# Altium PCB PCB2.PcbDoc
Units mm, origin at the board's own origin, x right, y up, seen from the top; angles counter-clockwise.
Board outline 85.12 x 55.68 mm, 2 copper layers (Top Layer, Bottom Layer), stack 1.569 mm thick; 61 components, 50 nets, 268 pads, 0 vias.
Unrouted connection lines stored in the file: 2.
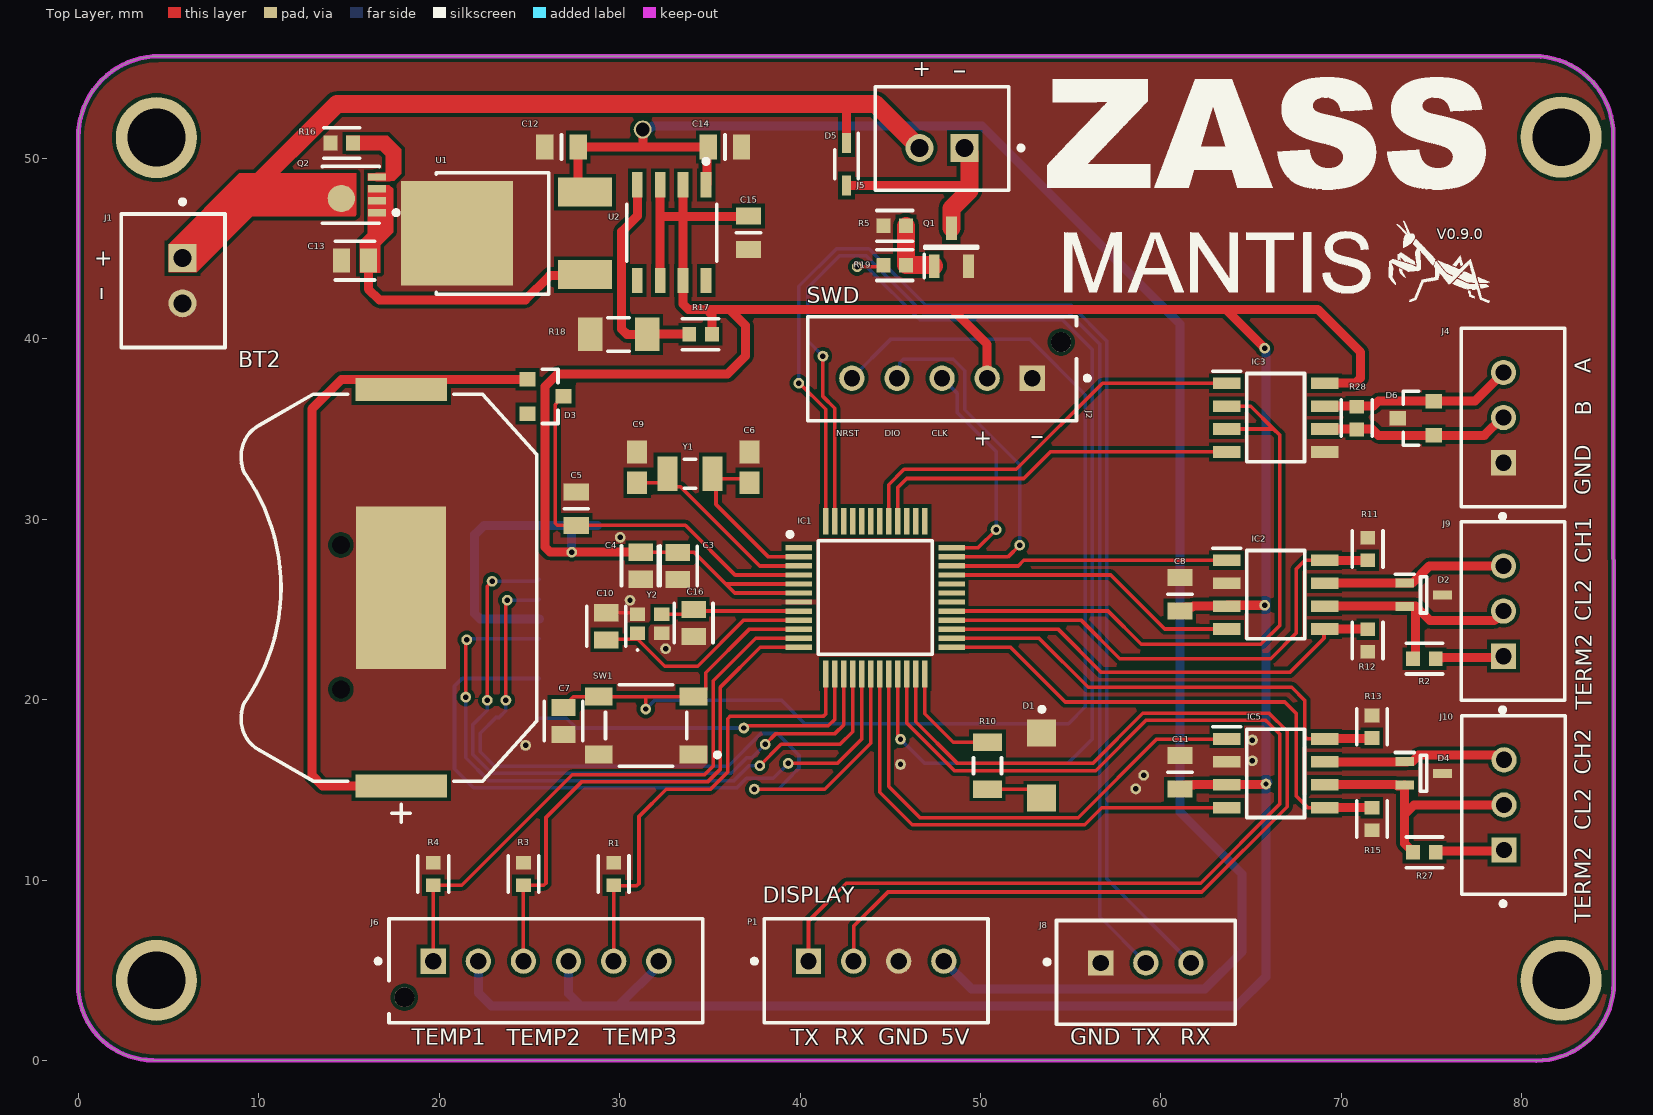
[diagram p0: Top Layer view]
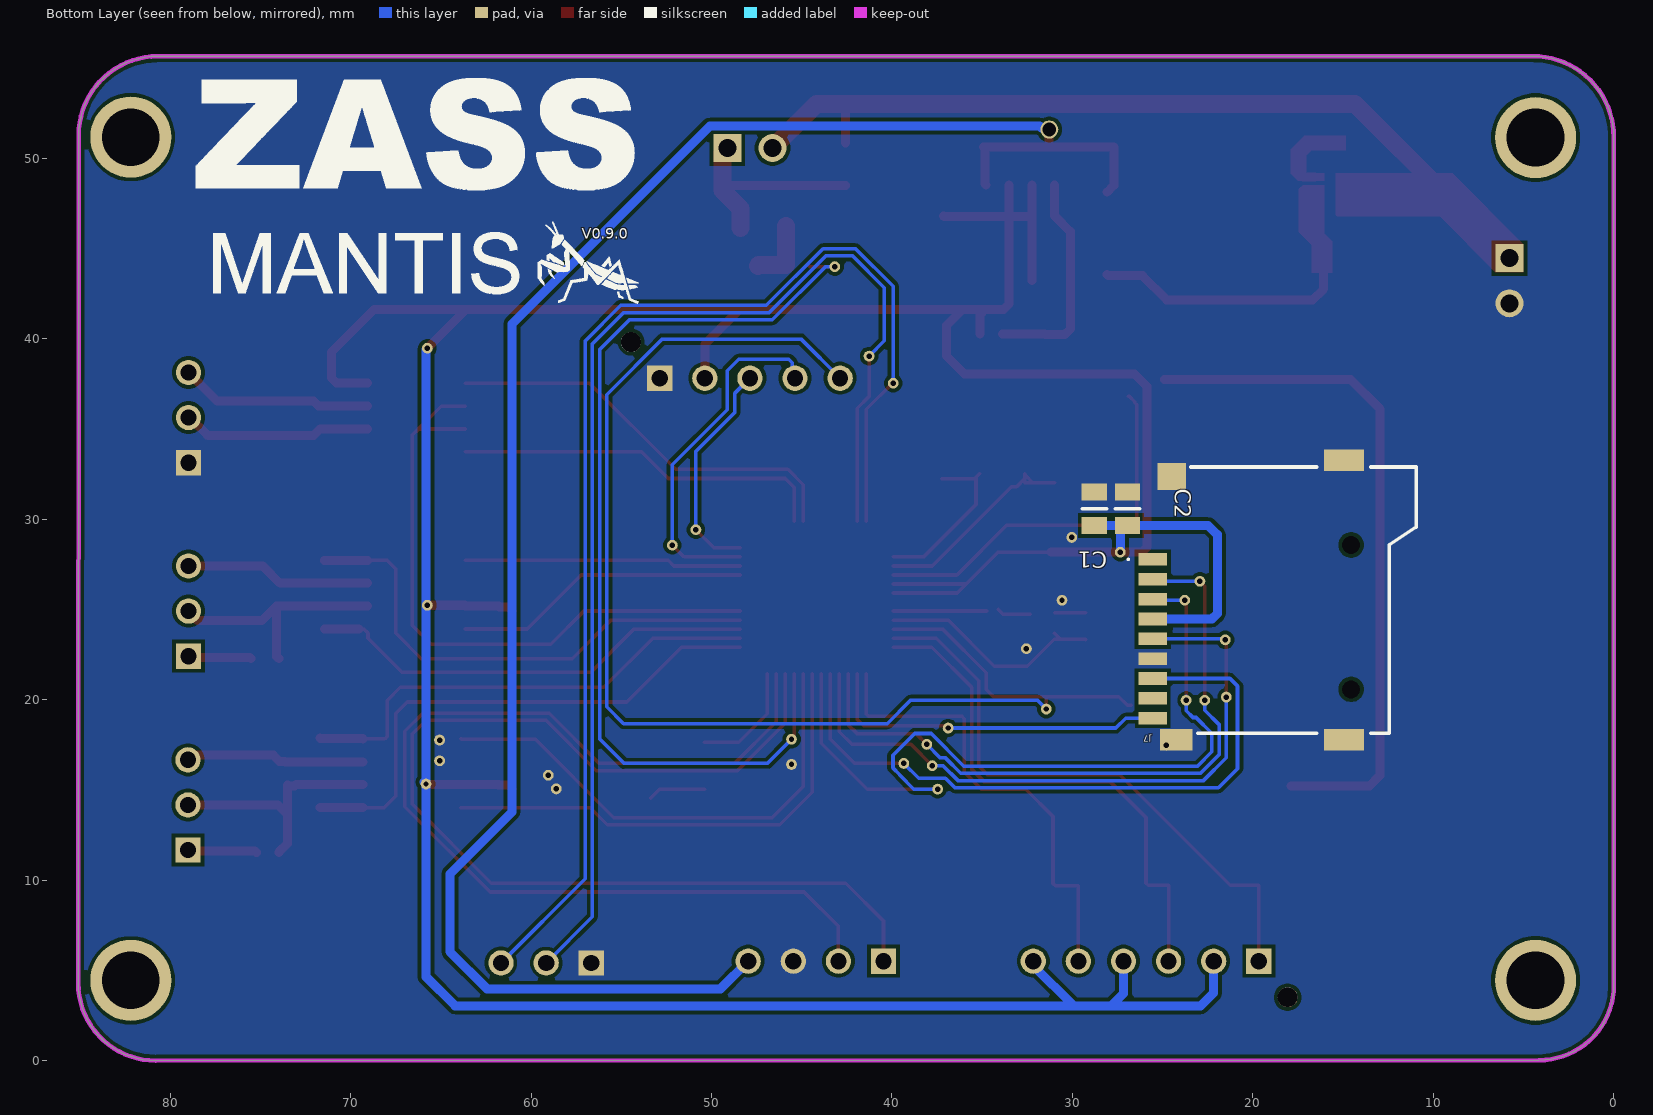
[diagram p1: Bottom Layer view, seen from below]
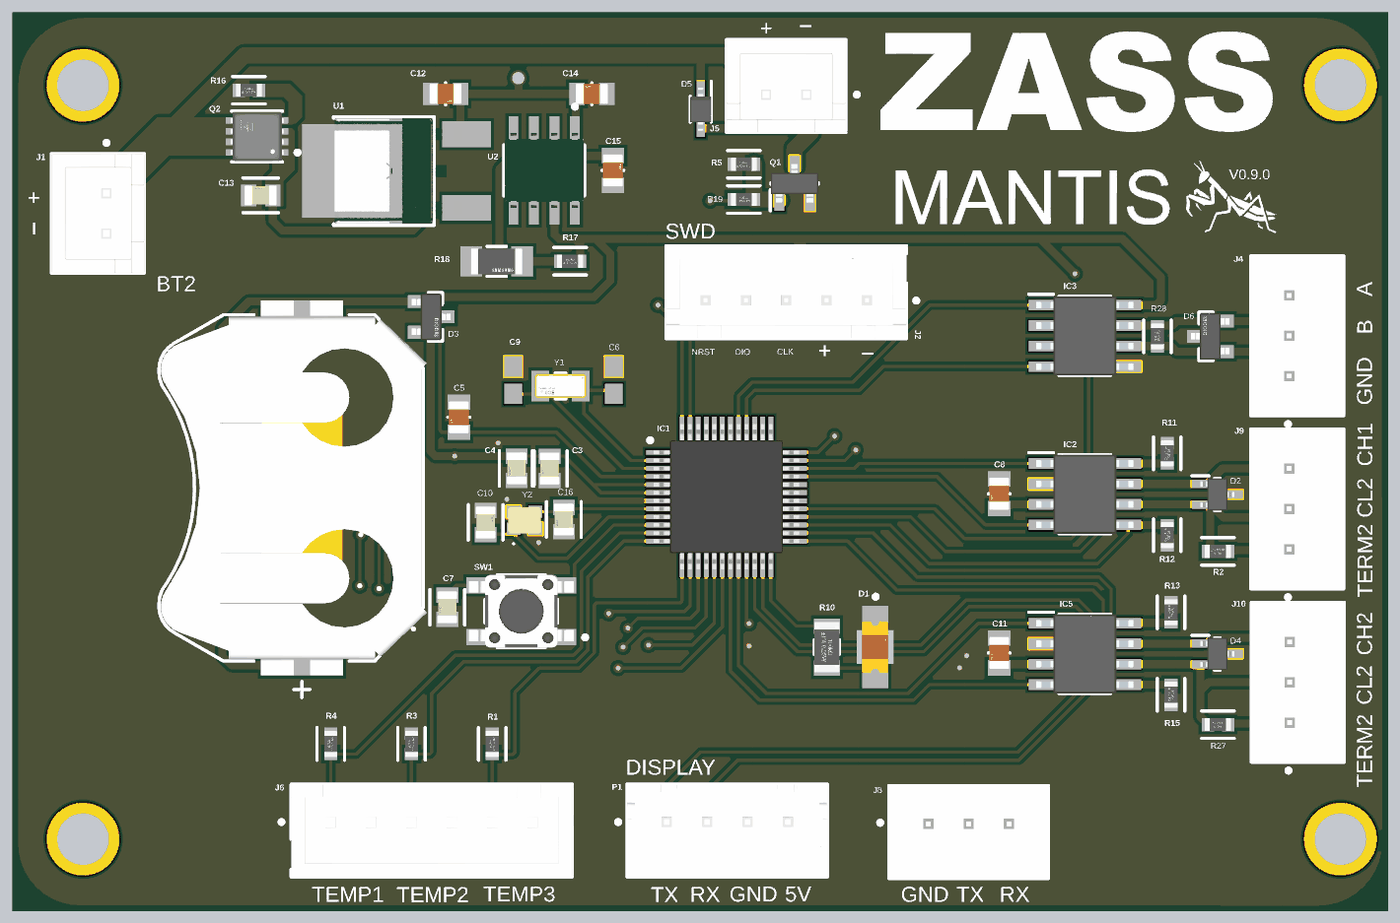
[diagram p2: 3D render of the assembled board from above, using the file's embedded part models]
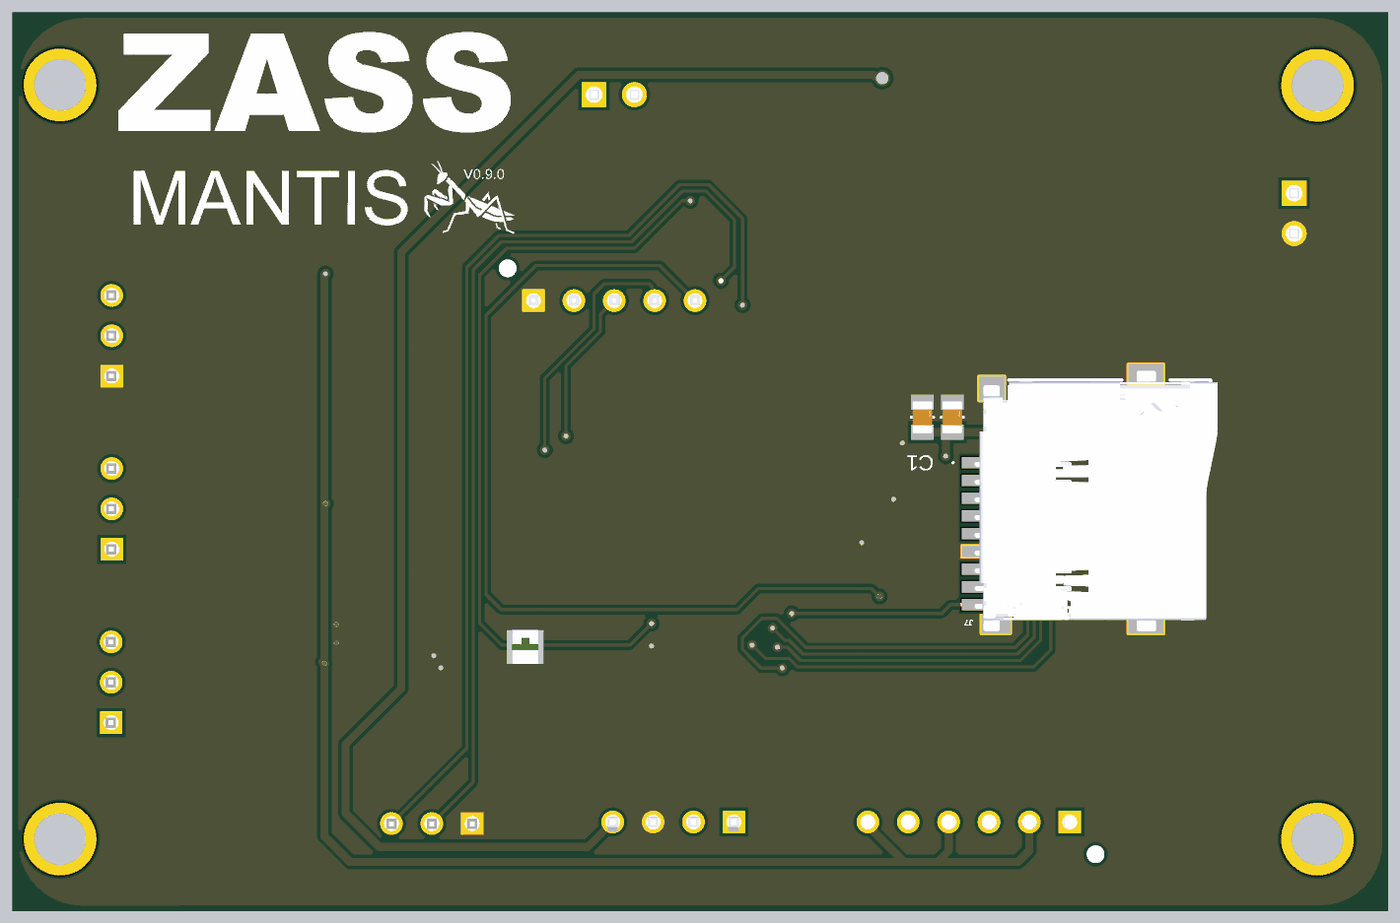
[diagram p3: 3D render of the assembled board from below, using the file's embedded part models]

## Layer stack, top to bottom
Top Solder: solder mask 0.0254, SM-001, Dk 4
Top Layer: signal copper 0.035
Dielectric 1: core 1.4986, Core-043, Dk 4.3
Bottom Layer: signal copper 0.035
Bottom Solder: solder mask 0.0254, SM-001, Dk 4

## Board outline
4.133,0.011 cw(c4.133,4.163) -0.02,4.163 -0.017,51.184 cw(c4.464,51.184) 4.464,55.665 80.681,55.665 cw(c80.681,51.269) 85.077,51.269 85.099,4.284 cw(c80.805,4.284) 80.805,-0.011

## Design rules (kind name [scope] priority, off if disabled: settings)
Clearance [All] p1: gap=0.2 ignorepadtopadclearanceinfootprint=FALSE
PolygonConnect PolygonConnect_4 [All vs IsNamedPolygon('Top Layer-GND')] p1: connectstyle=Direct reliefconductorwidth=0.254 reliefentries=4 polygonreliefangle="90 Angle" airgapwidth=0.254
PolygonConnect PolygonConnect_3 [All vs IsNamedPolygon('Top Layer-GND')] p2: connectstyle=Direct reliefconductorwidth=0.254 reliefentries=4 polygonreliefangle="90 Angle" airgapwidth=0.254
PolygonConnect PolygonConnect_2 [All vs IsNamedPolygon('Bottom Layer-GND')] p3: connectstyle=Direct reliefconductorwidth=0.254 reliefentries=4 polygonreliefangle="90 Angle" airgapwidth=0.254
PolygonConnect PolygonConnect_1 [All vs IsNamedPolygon('Top Layer-GND')] p4: connectstyle=Direct reliefconductorwidth=0.254 reliefentries=4 polygonreliefangle="90 Angle" airgapwidth=0.254
PolygonConnect [All] p5: connectstyle=Relief reliefconductorwidth=0.254 reliefentries=4 polygonreliefangle="90 Angle" airgapwidth=0.254
RoutingVias [All] p1: holewidth=0.711 width=1.27 viastyle="Through Hole" minholewidth=0.711 minwidth=1.27 maxholewidth=0.711 maxwidth=1.27
SolderMaskExpansion [All] p1: expansion=0.102 istentingtop=FALSE
SupplyNets "Schematic Supply Nets_2" [InNet('GND')] p1: voltage=0.000
SupplyNets "Schematic Supply Nets_1" [InNet('+5')] p2: voltage=0.000
SupplyNets "Schematic Supply Nets" [InNet('VDD')] p3: voltage=0.000
Width [All] p1: maxlimit=1 minlimit=0.2 preferedwidth=0.5 minimp=50.000000 maximp=50.000000 favimp=50.000000
30 further rules are at their usual default settings.

## Classes and differential pairs
component class U_STM32G0B1CBT6TR: BT1 BT2 C3 C4 C5 C6 C7 C9 C10 C16 D1 D3 IC1 R10 SW1 Y1 Y2
component class U_POWER: C12 C13 C14 C15 Q2 R16 R17 R18 U1 U2
component class U_COMM: C8 C11 D2 D4 IC2 IC5 R11 R12 R13 R15
component class MAIN: C1 C2 D5 J1 J2 J4 J5 J6 J7 J8 P1 Q1 R1 R2 R3 R4 R5 R19 R27 R28

## Components (designator, comment, footprint, x,y, rotation, side; value= is the part's Value field where it differs from the comment)
BT1 "CR2032" FP-CR2032-MFG -13.28,26.06 r0 top
BT2 "3034TR" FP-3034TR-MFG 17.207,26.206 r90 top
C1 "CC0805KRX7R5BB104" FP-CC0805-EA-MFG 28.776,30.587 r270 bottom
C2 "CC0805KRX7R5BB104" FP-CC0805-EA-MFG 26.933,30.587 r270 bottom
C3 "C0805C104K5RACTU" FP-C0805C-DN-MFG 33.217,27.41 r90 top value="0.10 μF"
C4 "C0805C104K5RACTU" FP-C0805C-DN-MFG 31.171,27.422 r90 top value="0.10 μF"
C5 "CC0805KRX7R5BB104" FP-CC0805-EA-MFG 27.587,30.587 r90 top
C6 "06035A220KAT2A" CAPC1608X90X35ML15T15 37.186,32.876 r270 top
C7 "C0805C104K5RACTU" FP-C0805C-DN-MFG 26.878,18.813 r90 top value="0.10 μF"
C8 "CC0805KRX7R5BB104" FP-CC0805-EA-MFG 61.052,25.842 r90 top
C9 "06035A220KAT2A" CAPC1608X90X35ML15T15 30.959,32.876 r270 top
C10 "C0805C519D3HACTU" FP-C0805C-DN-MFG 29.253,24.065 r270 top value="5.1 pF"
C11 "CC0805KRX7R5BB104" FP-CC0805-EA-MFG 61.052,15.977 r90 top
C12 "CC0805KRX7R5BB104" FP-CC0805-EA-MFG 26.77,50.631 r180 top
C13 "C0805C104K5RACTU" FP-C0805C-DN-MFG 15.321,44.337 r0 top value="0.10 μF"
C14 "CC0805KRX7R5BB104" FP-CC0805-EA-MFG 35.831,50.631 r0 top
C15 "CC0805KRX7R5BB104" FP-CC0805-EA-MFG 37.136,45.883 r270 top
C16 "C0805C519D3HACTU" FP-C0805C-DN-MFG 34.092,24.251 r90 top value="5.1 pF"
D1 "LTST-C230EKT" FP-LTST-C230EKT-MFG 53.371,16.34 r270 top
D2 "ESDCAN06-2BWY" SOT65P210X110-3N 74.56,25.802 r0 top
D3 "BAT54S-7-F" FP-SOT23-MFG 25.878,36.806 r0 top
D4 "ESDCAN06-2BWY" SOT65P210X110-3N 74.56,15.917 r0 top
D5 "1N4007WS" SOD2613X110N 42.573,49.672 r270 top
D6 "BAT54S-7-F" FP-SOT23-MFG 74.119,35.6 r180 top (schematic designator D3)
IC1 "STM32G0B1CBT6TR" QFP50P900X900X160-48N 44.16,25.66 r0 top
IC2 "TCAN3414DR" SOIC127P600X175-8N 66.357,25.818 r0 top
IC3 "TCAN3414DR" SOIC127P600X175-8N 66.356,35.63 r0 top (schematic designator IC2)
IC5 "TCAN3414DR" SOIC127P600X175-8N 66.357,15.917 r0 top
J1 "B2B-XH-A(LF)(SN)" FP-B2B-XH-A_LF_SN-MFG 5.24,43.22 r270 top
J2 "B5B-XH-AM(LF)(SN)" FP-B5B-XH-AM_LF_SN-MFG 47.865,38.34 r0 top
J4 "B3B-XH-A(LF)(SN)" FP-B3B-XH-A_LF_SN-MFG 79.508,35.635 r90 top
J5 "S2B-XH-A(LF)(SN)" FP-B2B-XH-A_LF_SN-MFG 47.865,51.105 r180 top
J6 "B6B-XH-AM(LF)(SN)" FP-B6B-XH-AM_LF_SN-MFG 25.909,4.975 r180 top
J7 "MSD-4-A" MSD4A 18.637,25.522 r90 bottom
J8 "B3B-XH-A(LF)(SN)" FP-B3B-XH-A_LF_SN-MFG 59.16,4.88 r0 top
J9 "B3B-XH-A(LF)(SN)" FP-B3B-XH-A_LF_SN-MFG 79.508,24.908 r90 top (schematic designator J4)
J10 "B3B-XH-A(LF)(SN)" FP-B3B-XH-A_LF_SN-MFG 79.54,14.162 r90 top (schematic designator J4)
P1 "B4B-XH-A(LF)(SN)" FP-B4B-XH-A_LF_SN-MFG 44.21,4.975 r180 top
Q1 "AO3422" SOT95P237X112-3N 48.38,45.08 r90 top
Q2 "SI7113ADN-T1-GE3" FP-S16-2667-SINGLE-MFG 15.1,47.982 r180 top
R1 "CRGCQ0603J10K" FP-CRGCQ0603-IPC_C 29.659,10.34 r90 top value=10KΩ
R2 "CRGCQ0603F120R" FP-CRGCQ0603-IPC_C 74.596,22.271 r180 top value=120Ω
R3 "CRGCQ0603J10K" FP-CRGCQ0603-IPC_C 24.659,10.34 r90 top value=10KΩ
R4 "CRGCQ0603J10K" FP-CRGCQ0603-IPC_C 19.659,10.34 r90 top value=10KΩ
R5 "CRGCQ0603J10K" FP-CRGCQ0603-IPC_C 45.241,46.265 r0 top value=10KΩ
R10 "CRGCQ1206F1K0" FP-CRGCQ1206-IPC_C 50.383,16.34 r270 top value=1KΩ
R11 "CRGCQ0603J10K" FP-CRGCQ0603-IPC_C 71.457,28.348 r270 top value=10KΩ
R12 "CRGCQ0603J10K" FP-CRGCQ0603-IPC_C 71.457,23.277 r270 top value=10KΩ
R13 "CRGCQ0603J10K" FP-CRGCQ0603-IPC_C 71.692,18.497 r270 top value=10KΩ
R15 "CRGCQ0603J10K" FP-CRGCQ0603-IPC_C 71.692,13.385 r270 top value=10KΩ
R16 "CRGCQ0603F1K2" FP-CRGCQ0603-IPC_C 14.59,50.852 r0 top value=1.2KΩ
R17 "CRGCQ0603F1K2" FP-CRGCQ0603-IPC_C 34.481,40.254 r0 top value=1.2KΩ
R18 "RC3216J202CS" FP-RC3216-IPC_A 29.936,40.243 r0 top
R19 "CRGCQ0603F1K2" FP-CRGCQ0603-IPC_C 45.241,44.079 r0 top value=1.2KΩ
R27 "CRGCQ0603F120R" FP-CRGCQ0603-IPC_C 74.596,11.535 r180 top value=120Ω
R28 "CRGCQ0603F120R" FP-CRGCQ0603-IPC_C 70.851,35.6 r90 top value=120Ω
SW1 "PTS647SK38SMTR2LFS" FP-PTS647SK38SMTR2LFS-MFG 31.459,18.564 r180 top
U1 "MC7805CDTRKG" FP-369C-MFG 23.77,45.844 r90 top
U2 "LM317LD13TR" FP-SO-8-0016023-MFG 32.876,45.883 r270 top
Y1 "ECX-.327-CDX-1293" FP-ECS-CDX-MFG 33.892,32.524 r180 top
Y2 "ECS-240-6-37B-7KM-TR" ECS240637B7KMTR 31.66,24.198 r0 top

## Footprints (in the part's own frame and the unit in brackets; to place one, negate y for a bottom-side part, rotate by r counter-clockwise, add the part's x,y. Pads: shape width x height; smd on the part's side, far side on the other; paste and mask are expansions set on the pad)
CAPC1608X90X35ML15T15 [mm] "Chip Capacitor, 2-Leads, Body 1.60x0.81mm, IPC Low Density"
  rect 1.25x1.1 smd: 1(-0.85,0) 2(0.85,0)
  body extent -0.88,-0.48 0.87,0.48, height 0.9
ECS240637B7KMTR [mm]
  rect 0.85x0.75 smd: 1(-0.675,-0.525) 2(0.675,-0.525) 3(0.675,0.525) 4(-0.675,0.525)
  silkscreen extent -0.72,-1.5 -0.63,-1.4, body extent -1,-0.8 1,0.8, height 0.5
FP-369C-MFG [mm]
  rect 1.6x3 smd paste+0 mask+0: 1(-2.285,-4.3) 3(2.285,-4.3)
  rect 5.8x6.2 smd paste+0 mask+0: 4(0,2.79)
  silkscreen extent -3.36,-2.28 3.36,3.94, body extent -3.46,-5.9 3.46,5.99, height 0.25
FP-3034TR-MFG [mm]
  rect 9x5 smd paste-1000 mask+0: 1(0,-0.673)
  rect 1.27x5.08 smd paste+0 mask+0: 2(-10.985,-0.673) 2(10.985,-0.673)
  silkscreen extent -13,-8.19 10.73,8.19, body extent -11.72,-8.29 11.72,8.29, height 0.25
FP-B2B-XH-A_LF_SN-MFG [mm]
  rect 1.55x1.55 hole 1 paste-2539.97 mask+0: 1(-1.25,0.525)
  round 1.55 hole 1 paste-2539.97 mask+0: 2(1.25,0.525)
  silkscreen extent -4.5,-2.88 3.7,2.88, body extent -3.8,-2.98 3.8,2.98, height 0.25
FP-B3B-XH-A_LF_SN-MFG [mm]
  rect 1.4x1.4 hole 0.9 paste-2539.97 mask+0: 1(-2.5,0.525)
  round 1.4 hole 0.9 paste-2539.97 mask+0: 2(0,0.525) 3(2.5,0.525)
  silkscreen extent -5.6,-2.88 4.95,2.88, body extent -5.05,-2.98 5.05,2.98, height 0.25
FP-B4B-XH-A_LF_SN-MFG [mm]
  rect 1.4x1.4 hole 0.9 paste-2539.97 mask+0: 1(3.75,-0.525)
  round 1.4 hole 0.9 paste-2539.97 mask+0: 2(1.25,-0.525) 3(-1.25,-0.525) 4(-3.75,-0.525)
  silkscreen extent -6.2,-2.88 6.87,2.88, body extent -6.3,-2.98 6.3,2.98, height 0.25
FP-B5B-XH-AM_LF_SN-MFG [mm]
  rect 1.4x1.4 hole 0.9 paste-2539.97 mask+0: 1(5,-0.525)
  round 1.4 hole 0.9 paste-2539.97 mask+0: 2(2.5,-0.525) 3(0,-0.525) 4(-2.5,-0.525) 5(-5,-0.525)
  round 1.1 hole 1.1 unplated paste-2539.97 mask+0: ""(6.6,1.475)
  silkscreen extent -7.45,-2.88 8.18,2.88, body extent -7.55,-2.98 7.55,2.98, height 0.25
FP-B6B-XH-AM_LF_SN-MFG [mm]
  rect 1.4x1.4 hole 0.9 paste-2539.97 mask+0: 1(6.25,-0.525)
  round 1.4 hole 0.9 paste-2539.97 mask+0: 2(3.75,-0.525) 3(1.25,-0.525) 4(-1.25,-0.525) 5(-3.75,-0.525) 6(-6.25,-0.525)
  round 1.1 hole 1.1 unplated paste-2539.97 mask+0: ""(7.85,1.475)
  silkscreen extent -8.7,-2.88 9.42,2.88, body extent -8.8,-2.98 8.8,2.98, height 0.25
FP-C0805C-DN-MFG [mm]
  rect 0.95x1.35 smd paste+0 mask+0: 1(-0.75,0) 2(0.75,0)
  silkscreen extent -1.1,-1.07 1.1,1.07, body extent -1.4,-0.85 1.4,0.85, height 0.25
FP-CC0805-EA-MFG [mm]
  rect 0.95x1.4 smd paste+0 mask+0: 1(-0.925,0) 2(0.925,0)
  silkscreen extent 0,-0.67 0,0.67, body extent -1,-0.63 1,0.63, height 0.95
FP-CR2032-MFG [mm]
  body extent -10.1,-10.1 10.1,10.1, height 0.25
FP-CRGCQ0603-IPC_C [mm]
  rect 0.758x0.812 smd paste+0 mask+0: 1(-0.627,0) 2(0.627,0)
  silkscreen extent -1.01,-0.85 1.01,0.85, body extent -1.11,-0.55 1.11,0.55, height 0.25
FP-CRGCQ1206-IPC_C [mm]
  rect 0.956x1.61 smd paste+0 mask+0: 1(-1.301,0) 2(1.301,0)
  silkscreen extent -0.45,-0.77 0.45,0.77, body extent -1.88,-0.95 1.88,0.95, height 0.25
FP-ECS-CDX-MFG [mm]
  rect 1.1x1.9 smd paste+0 mask+0: 1(-1.25,0) 2(1.25,0)
  silkscreen extent -0.33,-0.8 0.33,0.8, body extent -1.9,-1.05 1.9,1.05, height 0.25
FP-LTST-C230EKT-MFG [mm]
  rect 1.5x1.6 smd paste+0 mask+0: 1(-1.8,0) 2(1.8,0)
  silkscreen extent -3.25,-0.1 -3,0.15, body extent -2.65,-0.95 2.65,0.95, height 0.25
FP-PTS647SK38SMTR2LFS-MFG [mm]
  rect 1.55x1 smd paste+0 mask+0: 1(-2.625,1.6) 2(2.625,1.6) 3(-2.625,-1.6) 4(2.625,-1.6)
  silkscreen extent -4.08,-2.25 2.25,2.25, body extent -3.5,-2.35 3.5,2.35, height 0.25
FP-RC3216-IPC_A [mm]
  rect 1.355x1.858 smd paste+0 mask+0: 1(-1.576,0) 2(1.576,0)
  silkscreen extent -0.6,-0.93 0.6,0.93, body extent -2.75,-1.43 2.75,1.43, height 0.25
FP-S16-2667-SINGLE-MFG [mil]
  rect 39x16 smd paste+0 mask+0: 1(-56.5,39) 2(-56.5,13) 3(-56.5,-13) 4(-56.5,-39)
  round 59.4 smd paste+0 mask+0: 5-6-7-8(21,8)
  Top Layer region: -12,44 46,44 46,47 76,47 76,31 56,31 56,21 76,21 76,5 56,5 56,-5 76,-5 76,-21 56,-21 56,-31 76,-31 76,-47 46,-47 46,-44 -12,-44
  silkscreen extent -103,-62 62,62, body extent -80,-71 80,71, height 10
FP-SO-8-0016023-MFG [mm]
  rect 1.4x0.6 smd paste+0 mask+0: 1(-2.65,1.905) 2(-2.65,0.635) 3(-2.65,-0.635) 4(-2.65,-1.905) 5(2.65,-1.905) 6(2.65,-0.635) 7(2.65,0.635) 8(2.65,1.905)
  silkscreen extent -4.08,-2.5 1.58,2.5, body extent -3.45,-2.6 3.45,2.6, height 0.25
FP-SOT23-MFG [mm]
  rect 0.9x0.8 smd paste+0 mask+0: 1(-1,0.95) 2(-1,-0.95) 3(1,0)
  silkscreen extent -0.18,-1.5 0.7,1.5, body extent -1.55,-1.6 1.55,1.6, height 0.25
MSD4A [mm]
  rect 0.7x1.6 smd: 1(2.25,6.9) 2(1.15,6.9) 3(0.05,6.9) 4(-1.05,6.9) 5(-2.15,6.9) 6(-3.25,6.9) 7(-4.35,6.9) 8(-5.45,6.9) CD1(-6.55,6.9)
  rect 1.5x1.6 smd: G1(6.85,5.85)
  rect 1.2x2.2 smd: G2(7.75,-3.7) G3(-7.75,-3.7)
  rect 1.2x1.8 smd: G4(-7.75,5.6)
  round 0.5 hole 1 unplated: MH1(3.05,-4.1) MH2(-4.95,-4.1)
  silkscreen extent -7.37,-7.7 7.37,8.3, body extent -8.2,-8.13 7.95,6.92, height 1.8
QFP50P900X900X160-48N [mm]
  rect 1.475x0.3 smd: 1(-4.238,2.75) 2(-4.238,2.25) 3(-4.238,1.75) 4(-4.238,1.25) 5(-4.238,0.75) 6(-4.238,0.25) 7(-4.238,-0.25) 8(-4.238,-0.75) 9(-4.238,-1.25) 10(-4.238,-1.75) 11(-4.238,-2.25) 12(-4.238,-2.75) 25(4.238,-2.75) 26(4.238,-2.25) 27(4.238,-1.75) 28(4.238,-1.25) 29(4.238,-0.75) 30(4.238,-0.25) 31(4.238,0.25) 32(4.238,0.75) 33(4.238,1.25) 34(4.238,1.75) 35(4.238,2.25) 36(4.238,2.75)
  rect 0.3x1.475 smd: 13(-2.75,-4.238) 14(-2.25,-4.238) 15(-1.75,-4.238) 16(-1.25,-4.238) 17(-0.75,-4.238) 18(-0.25,-4.238) 19(0.25,-4.238) 20(0.75,-4.238) 21(1.25,-4.238) 22(1.75,-4.238) 23(2.25,-4.238) 24(2.75,-4.238) 37(2.75,4.238) 38(2.25,4.238) 39(1.75,4.238) 40(1.25,4.238) 41(0.75,4.238) 42(0.25,4.238) 43(-0.25,4.238) 44(-0.75,4.238) 45(-1.25,4.238) 46(-1.75,4.238) 47(-2.25,4.238) 48(-2.75,4.238)
  silkscreen extent -4.85,-3.15 3.15,3.62, body extent -4.5,-4.5 4.5,4.5, height 1.41
SOD2613X110N [mm]
  rect 1.1x0.5 smd: 1(-1.175,0) 2(1.175,0)
  silkscreen extent -1.73,-0.65 0.8,0.65, body extent -1.33,-0.65 1.33,0.65, height 1.1
SOIC127P600X175-8N [mm]
  rect 1.525x0.65 smd: 1(-2.712,1.905) 2(-2.712,0.635) 3(-2.712,-0.635) 4(-2.712,-1.905) 5(2.712,-1.905) 6(2.712,-0.635) 7(2.712,0.635) 8(2.712,1.905)
  silkscreen extent -3.47,-2.45 1.6,2.58, body extent -3,-2.45 3,2.45, height 1.75
SOT65P210X110-3N [mm]
  rect 1.05x0.5 smd: 1(-1.05,0.65) 2(-1.05,-0.65) 3(1.05,0)
  silkscreen extent -1.58,-1 0.18,1.15, body extent -1.05,-1 1.05,1, height 1.1
SOT95P237X112-3N [mm]
  rect 1.3x0.6 smd: 1(-1.05,0.95) 2(-1.05,-0.95) 3(1.05,0)
  silkscreen extent -1.7,-1.46 0.05,1.5, body extent -1.18,-1.46 1.18,1.46, height 1.12

## Part data
BT1: library part CMP-05417-000003-1, "BATTERY LITHIUM 3V COIN 20MM", Manufacturer=Panasonic, Temperature="-30°C to +60°C", Temperature Range High=+60°C, Temperature Range Low=-30°C, Automotive=No, Category=Batt, ComponentLink2Description=Datasheet, ComponentLink2URL=https://upverter.com/datasheet/5ee6469450a36cf26ddc1e0271adf06b3d83bec7.pdf, Device Class L1="Passive Components", Device Class L2=unset, Device Class L3=unset, Height=3.2mm, Manufacturer Part Number=CR2032, Mouser Description="Battery; Lithium High Energy; 3 VoltS; 230 MAH; Coin Cell", Octopart=https://octopart.com/cr2032-panasonic-39385932, Package=CR2032
BT2: library part CMP-19636-000007-1, "BATTERY RETAINER COIN 20MM SMD", Case/Package=SMD/SMT, Package Quantity=500, Contact Plating=Tin, Lead Free="Lead Free", Material=Bronze, Mount="Surface Mount", Number of Batteries=1, Number of Cells=1, Packaging="Tape and Reel", Termination=SMD/SMT
C1 C2 C5 C8 C11 C12 C14 C15: library part CMP-03422-000810-2, "CAP CER X7R 0805", RoHS Compliant=Yes
C3 C4 C7 C13: library part CMP-2007-00279-2, "CAP CER 0.1UF 50V X7R 0805", Capacitance="0.10 μF", Manufacturer=KEMET, Package=C0805C-DN, Temperature="-55°C to +125°C", Temperature Characteristic=X7R, Temperature Coefficient=30ppm/°C, Temperature Range High=+125°C, Temperature Range Low=-55°C, Tolerance=0.1, Voltage Rating="50 V", Automotive=No, Category=Cap, ComponentLink2Description=Datasheet, ComponentLink2URL=https://content.kemet.com/datasheets/KEM_C1003_C0G_SMD.pdf, Device Class L1="Passive Components", Device Class L2=Capacitors, Device Class L3="Ceramic Capacitors", Digikey Description="CAP CER 0.1UF 50V X7R 0805", Height=0.88mm, Ipc Land Pattern Name=CAPC200125X78, Lead Free=Yes, Manufacturer Part Number=C0805C104K5RACTU, Material=Ceramic, Mouser Description="Cap Ceramic 0.1uF 50V X7R 10% SMD 2.0 x 1.2 mm 125 C Paper T/R", Octopart=https://octopart.com/c0805c104k5ractu-kemet-143926, RoHS=TRUE
C6 C9: library part CMP-2006-04272-1, Manufacturer="AVX Interconnect / Elco", Part Number=06035A220KAT2A
C10 C16: library part CMP-03020-033346-1, "C0805 5.1 pF X8R 30ppm/°C 0.5 pF 25 V", Capacitance="5.1 pF", Manufacturer=KEMET, Package=C0805C-DN, Temperature="-55°C to +125°C", Temperature Characteristic=X8R, Temperature Coefficient=30ppm/°C, Temperature Range High=+125°C, Temperature Range Low=-55°C, Tolerance="0.5 pF", Voltage Rating="25 V", Automotive=No, Category=Cap, ComponentLink2Description=Datasheet, ComponentLink2URL=https://content.kemet.com/datasheets/KEM_C1003_C0G_SMD.pdf, Device Class L1="Passive Components", Device Class L2=Capacitors, Device Class L3="Ceramic Capacitors", Height=0.88mm, Ipc Land Pattern Name=CAPC200125X78, Lead Free=Yes, Manufacturer Part Number=C0805C519D3HACTU, Material=Ceramic, Octopart=https://octopart.com/c0805c519d3hactu-kemet-88727353, RoHS=TRUE
D1: library part CMP-22017-000030-1, "LED RED CLEAR CHIP SMD", Case Code (Imperial)=1206, Case Code (Metric)=3216, Color=Red, Forward Current=30mA, Forward Voltage=2V, Lens Color=Colorless, Max Operating Temperature=85°C, Min Operating Temperature=-55°C, Package Quantity=1, Power Dissipation=100mW, Reverse Voltage=5V, Test Current=10mA, Case/Package=1206, Depth=1.6mm, Dominant Wavelength=621nm, Height=1.1mm, Illumination Color=Red, Lead Free="Lead Free", Length=3.2mm, Lens Style=Diffused, Lens Transparency=Clear, Luminous Intensity=6mcd, Mount="Surface Mount", Number of Elements=1, Number of LEDs=1, Number of Pins=2, Packaging="Tape and Reel", Power Rating=100mW, Radiation Hardening=No, Viewing Angle=130°, Wavelength=630nm, Width=1.6mm
D2 D4: "TVS Diode (Bi-directional)", Manufacturer_Name=STMicroelectronics, Mouser Part Number=511-ESDCAN06-2BWY, Arrow Part Number=ESDCAN06-2BWY, Arrow Price/Stock=https://www.arrow.com/en/products/esdcan06-2bwy/stmicroelectronics?utm_currency=USD&region=europe, Datasheet Link=https://www.st.com/resource/en/datasheet/esdcan03-2bwy.pdf, Height=1.1mm, Manufacturer_Part_Number=ESDCAN06-2BWY, Mouser Price/Stock=https://www.mouser.co.uk/ProductDetail/STMicroelectronics/ESDCAN06-2BWY?qs=u4fy%2FsgLU9P2WkvcJBEfoQ%3D%3D
D3 D6: library part CMP-1667-00006-2, "DIODE ARRAY SCHOTTKY 30V SOT23-3", Average Rectified Current=200mA, Capacitance=10pF, Case/Package=SOT-23, Forward Voltage=800mV, Max Forward Surge Current (Ifsm)=600mA, Max Operating Temperature=150°C, Max Power Dissipation=200mW, Max Repetitive Reverse Voltage (Vrrm)=30V, Min Operating Temperature=-65°C, Package Quantity=3000, Peak Reverse Current=2uA, Contact Plating=Tin, Current Rating=200mA, Forward Current=200mA, Height=1mm, Lead Free="Lead Free", Length=2.9mm, Max Reverse Voltage (DC)=30V, Mount="Surface Mount", Number of Pins=3, Packaging="Tape and Reel", Peak Non-Repetitive Surge Current=600mA, Power Dissipation=200mW, Power Rating=200mW, Radiation Hardening=No, REACH SVHC="No SVHC", Reverse Recovery Time=5ns, Termination=SMD/SMT, Voltage Rating (DC)=30V, Weight=0.000282oz, Width=1.3mm
D5: "Diode", Manufacturer_Name=MDD, Datasheet Link=https://datasheet.lcsc.com/szlcsc/MDD-Jiangsu-Yutai-Elec-1N4007WS_C193404.pdf, Height=1.1mm, Manufacturer_Part_Number=1N4007WS
IC1: "Integrated Circuit", Manufacturer_Name=STMicroelectronics, Mouser Part Number=511-STM32G0B1CBT6TR, Arrow Part Number=STM32G0B1CBT6TR, Arrow Price/Stock=https://www.arrow.com/en/products/stm32g0b1cbt6tr/stmicroelectronics?utm_currency=USD&region=nac, Datasheet Link=https://www.st.com/resource/en/datasheet/stm32g0b1cc.pdf, Height=1.6mm, Manufacturer_Part_Number=STM32G0B1CBT6TR, Mouser Price/Stock=https://www.mouser.co.uk/ProductDetail/STMicroelectronics/STM32G0B1CBT6TR?qs=HoCaDK9Nz5cqFCA6TLpp%252Bw%3D%3D
IC2 IC3 IC5: "Integrated Circuit", Manufacturer_Name="Texas Instruments", Mouser Part Number=595-TCAN3414DR, Arrow Part Number=TCAN3414DR, Arrow Price/Stock=https://www.arrow.com/en/products/tcan3414dr/texas-instruments?utm_currency=USD&region=nac, Datasheet Link=https://www.ti.com/lit/ds/symlink/tcan3414.pdf?ts=1713723144569&ref_url=https%253A%252F%252Fwww.mouser.ch%252F, Height=1.75mm, Manufacturer_Part_Number=TCAN3414DR, Mouser Price/Stock=https://www.mouser.co.uk/ProductDetail/Texas-Instruments/TCAN3414DR?qs=mELouGlnn3egF2AojRJddw%3D%3D
J1 J5: library part CMP-2000-05888-3, "CONN HEADER VERT 2POS 2.5MM", Color=Natural, Contact Resistance=20mR, Current Rating=3A, Housing Color=White, Insulation Resistance=1GR, Max Operating Temperature=85°C, Max Voltage Rating (AC)=250V, Min Operating Temperature=-25°C, Connector Type="Male Pin", Contact Material=Brass, Contact Plating=Tin, Contact Type="Male Pin", Depth=5.75mm, Fastening Type=Detent, Housing Material=Polyamide, Lead Free="Lead Free", Lead Pitch=2.5mm, Length=7.4mm, Max Current Rating=3A, Max Voltage Rating (DC)=250V, Mount="Through Hole", Number of Contacts=2, Number of Positions=2, Number of Rows=1, Orientation=Straight, Packaging=Bulk, Pitch=2.5mm, REACH SVHC="No SVHC", Series=XH, Termination=Solder, Voltage Rating=250V, Voltage Rating (AC)=250V, Wire/Cable Gauge=22AWG
J2: library part CMP-17439-000304-1, "CONN HEADER VERT 5POS 2.5MM", Color=Green, Contact Resistance=20mR, Flammability Rating="UL94 V-0", Housing Color=White, Insulation Color=Natural, Max Current Rating=3A, Max Operating Temperature=85°C, Max Voltage Rating (AC)=250V, Min Operating Temperature=-25°C, Connector Type=Header, Contact Finish - Mating=TIN, Contact Material=Brass, Contact Plating=Copper, Contact Shape=Square, Contact Type="Male Pin", Depth=5.75mm, Fastening Type=Detent, Housing Material=Polyamide, Insulation Material=Nylon, Lead Free="Lead Free", Length=14.9mm, Mated Stacking Heights=9.8mm, Mount="Through Hole", Number of Positions=5, Number of Rows=1, Orientation=Straight, Packaging=Bulk, Pitch=2.5mm, Series=XH, Termination=Solder, Voltage Rating=250V
J4 J8 J9 J10: library part CMP-17439-000014-3, "CONN HEADER VERT 3POS 2.5MM", Color=Natural, Contact Resistance=20mR, Current Rating=3A, Flammability Rating="UL94 V-0", Housing Color=White, Insulation Resistance=1GR, Max Operating Temperature=85°C, Max Voltage Rating (AC)=250V, Min Operating Temperature=-25°C, Connector Type=Header, Contact Finish - Mating=TIN, Contact Material=Brass, Contact Plating=Tin, Contact Shape=Square, Contact Type="Male Pin", Depth=5.75mm, Fastening Type=Detent, Gender=Male, Housing Material=Polyamide, Insulation Color=Natural, Insulation Material=Nylon, Lead Free="Lead Free", Lead Pitch=2.5mm, Length=9.9mm, Max Current Rating=3A, Max Voltage Rating (DC)=250V, Mount="Through Hole", Number of Contacts=3, Number of Positions=3, Number of Rows=1, Orientation=Straight, Packaging=Bulk, Pitch=2.5mm, REACH SVHC="No SVHC", Series=XH, Termination=Solder, Voltage Rating=250V, Voltage Rating (AC)=250V, Wire/Cable Gauge=22AWG
J6: library part CMP-17439-000167-1, "CONN HEADER VERT 6POS 2.5MM", Current Rating=3A, Flammability Rating="UL94 V-0", Insulation Color=Natural, Max Operating Temperature=85°C, Min Operating Temperature=-25°C, Voltage Rating=250V, Connector Type=Header, Contact Finish - Mating=TIN, Contact Material=Brass, Contact Plating=Copper, Contact Shape=Square, Contact Type="Male Pin", Fastening Type=Detent, Height=7mm, Insulation Material=Nylon, Length=17.4mm, Mated Stacking Heights=9.8mm, Mount="Through Hole", Number of Pins=6, Number of Poles=6, Number of Positions=6, Number of Rows=1, Packaging=Bulk, Pitch=2.5mm, Series=XH, Shape=Straight, Termination=Press-Fit, Width=5.75mm
J7: "Connector", Manufacturer_Name="Same Sky", Mouser Part Number=179-MSD-4-A, Arrow Part Number=MSD-4-A, Arrow Price/Stock=https://www.arrow.com/en/products/msd-4-a/cui-devices?utm_currency=USD&region=nac, Datasheet Link=https://www.sameskydevices.com/product/resource/MSD-4-A.pdf, Height=2mm, Manufacturer_Part_Number=MSD-4-A, Mouser Price/Stock=https://www.mouser.co.uk/ProductDetail/Same-Sky/MSD-4-A?qs=Z%252BL2brAPG1Jll%252BQTi%252Btupg%3D%3D
P1: library part CMP-17439-000250-1, "CONN HEADER VERT 4POS 2.5MM", Color=Natural, Contact Resistance=20mR, Current Rating=3A, Flammability Rating="UL94 V-0", Housing Color=White, Insulation Resistance=1GR, Max Operating Temperature=85°C, Max Voltage Rating (AC)=250V, Min Operating Temperature=-25°C, Package Quantity=500, Connector Type=Header, Contact Finish - Mating=TIN, Contact Material=Brass, Contact Plating=Tin, Contact Shape=Square, Contact Type="Male Pin", Depth=5.75mm, Fastening Type=Detent, Gender=Male, Housing Material=Polyamide, Insulation Color=Natural, Insulation Material=Nylon, Lead Free="Lead Free", Lead Pitch=2.5mm, Length=12.4mm, Mated Stacking Heights=9.8mm, Material=Polyamide, Max Current Rating=3A, Max Voltage Rating (DC)=250V, Mount="Through Hole", Number of Contacts=4, Number of Positions=4, Number of Rows=1, Orientation=Straight, Packaging=Bulk, Pitch=2.5mm, REACH SVHC="No SVHC", Series=XH, Termination=Solder, Voltage Rating=250V, Voltage Rating (AC)=250V, Wire/Cable Gauge=22AWG
Q1: "MOSFET (N-Channel)", Manufacturer_Name="Alpha & Omega Semiconductors", Arrow Part Number=AO3422, Arrow Price/Stock=https://www.arrow.com/en/products/ao3422/alpha-and-omega-semiconductor?region=nac, Datasheet Link=http://aosmd.com/res/data_sheets/AO3422.pdf, Height=1.12mm, Manufacturer_Part_Number=AO3422
Q2: library part CMP-02550-000064-1, "MOSFET P-CH 100V 10.8A 1212-8", Continuous Drain Current=-3.8A, Drain To Source Breakdown Voltage=-100V, Drain To Source Resistance=0.11Ω, Gate To Source Voltage=20V, Input Capacitace At Vds="515pF @ -50V", Manufacturer=Vishay, Max Forward Diode Voltage=-1.2V, Max Junction Temp=+150°C, Package=S16-2667-SINGLE, Power Dissipation=3.5W, Pulse Drain Current=-20A, Temperature="-55°C to +150°C", Temperature Range Low=-55°C, Typ Forward Diode Voltage=-0.8V, Automotive=No, Category=Trans, ComponentLink2Description=Datasheet, ComponentLink2URL=http://www.vishay.com/docs/77678/si7113adn.pdf, Depletion Mode=False, Device Class L1="Discrete Semiconductors", Device Class L2=Transistors, Device Class L3=MOSFETs, Digikey Description="MOSFET P-CH 100V 10.8A 1212-8", Drain To Source Voltage=-100V, Footprint Url=https://www.vishay.com/docs/72597/72597.pdf, Gate Charge At Vgs="10.9nC @ -10V", Height=1.17mm, Lead Free=Yes, Manufacturer Part Number=SI7113ADN-T1-GE3, Number of Channels=1, Number Of P Channels=1, Octopart=https://octopart.com/si7113adn-t1-ge3-vishay-88182558, Reverse Recovery Charge=80nC, Reverse Recovery Time=43ns, RoHS=TRUE, Rthja Max=36°C/W, Standoff Height=0mm, Temperature Range High=+150°C, Threshold Vgs Max=-2.6V, Threshold Vgs Min=-1.1V, Transconductance=8S, Turn Off Delay Time=20ns, Turn On Delay Time=10ns
R1 R3 R4 R5 R11 R12 R13 R15: library part CMP-03211-009884-1, "CRGCQ 0603 10K 5%", Ambient Temperature Range High=+70°C, Manufacturer="TE Connectivity", Package=CRGCQ0603, Power Rating=0.1W, Resistance=10KΩ, Temperature="-55°C to +155°C", Temperature Coefficient=±100ppm/°C, Temperature Range High=+155°C, Temperature Range Low=-55°C, Tolerance=0.05, Voltage Rating=75V, Category=Res, ComponentLink2Description=Datasheet, ComponentLink2URL=https://www.te.com/commerce/DocumentDelivery/DDEController?Action=showdoc&DocId=Data+Sheet%7F1773204-3%7F1%7Fpdf%7FEnglish%7FENG_DS_1773204-3_1.pdf%7F4-2176339-923, Composition="Thick Film", Device Class L1="Passive Components", Device Class L2=Resistors, Device Class L3="Chip SMD Resistors", Digikey Description="CRGCQ 0603 10K 5%", Height=0.55mm, Ipc Land Pattern Name=RESC16080X45, Lead Free=Yes, Manufacturer Part Number=CRGCQ0603J10K, Mouser Description="Res Thick Film 0603 10K Ohm 5% 0.1W(1/10W) ±100ppm/C Pad SMD Automotive T/R", Octopart=https://octopart.com/crgcq0603j10k-te+connectivity-91018097, RoHS=TRUE, Series=CRGCQ
R2 R27 R28: library part CMP-03211-001601-1, "CRGCQ0603 120Ω 1% ±100ppm/°C 75V", Ambient Temperature Range High=+70°C, Manufacturer="TE Connectivity", Package=CRGCQ0603, Power Rating=0.1W, Resistance=120Ω, Temperature="-55°C to +155°C", Temperature Coefficient=±100ppm/°C, Temperature Range High=+155°C, Temperature Range Low=-55°C, Tolerance=0.01, Voltage Rating=75V, Category=Res, ComponentLink2Description=Datasheet, ComponentLink2URL=https://www.te.com/commerce/DocumentDelivery/DDEController?Action=showdoc&DocId=Data+Sheet%7F1773204-3%7F1%7Fpdf%7FEnglish%7FENG_DS_1773204-3_1.pdf%7F4-2176339-482, Composition="Thick Film", Device Class L1="Passive Components", Device Class L2=Resistors, Device Class L3="Chip SMD Resistors", Height=0.55mm, Ipc Land Pattern Name=RESC16080X45, Lead Free=Yes, Manufacturer Part Number=CRGCQ0603F120R, Mouser Description="Res, Aec-Q200, Thick Film, 120R, 1%, 0603", Octopart=https://octopart.com/crgcq0603f120r-te+connectivity-91018039, RoHS=TRUE, Series=CRGCQ
R10: library part CMP-03211-006592-1, "CRGCQ1206 1KΩ 0.25W 1% ±100ppm/°C 200V", Ambient Temperature Range High=+70°C, Manufacturer="TE Connectivity", Package=CRGCQ1206, Power Rating=0.25W, Resistance=1KΩ, Temperature="-55°C to +155°C", Temperature Coefficient=±100ppm/°C, Temperature Range High=+155°C, Temperature Range Low=-55°C, Tolerance=0.01, Voltage Rating=200V, Automotive=Yes, Automotive Grade="Grade 685", Category=Res, ComponentLink2Description=Datasheet, ComponentLink2URL=https://www.te.com/commerce/DocumentDelivery/DDEController?Action=showdoc&DocId=Data+Sheet%7F1773204-3%7F1%7Fpdf%7FEnglish%7FENG_DS_1773204-3_1.pdf%7F4-2176347-694, Composition="Thick Film", Device Class L1="Passive Components", Device Class L2=Resistors, Device Class L3="Chip SMD Resistors", Height=0.65mm, Ipc Land Pattern Name=RESC310155X55, Lead Free=Yes, Manufacturer Part Number=CRGCQ1206F1K0, Octopart=https://octopart.com/crgcq1206f1k0-te+connectivity-91018258, RoHS=TRUE, Series=CRGCQ
R16 R17 R19: library part CMP-03211-000516-1, "CRGCQ 0603 1K2 1%", Ambient Temperature Range High=+70°C, Manufacturer="TE Connectivity", Package=CRGCQ0603, Power Rating=0.1W, Resistance=1.2KΩ, Temperature="-55°C to +155°C", Temperature Coefficient=±100ppm/°C, Temperature Range High=+155°C, Temperature Range Low=-55°C, Tolerance=0.01, Voltage Rating=75V, Category=Res, ComponentLink2Description=Datasheet, ComponentLink2URL=https://www.te.com/commerce/DocumentDelivery/DDEController?Action=showdoc&DocId=Data+Sheet%7F1773204-3%7F1%7Fpdf%7FEnglish%7FENG_DS_1773204-3_1.pdf%7F4-2176339-710, Composition="Thick Film", Device Class L1="Passive Components", Device Class L2=Resistors, Device Class L3="Chip SMD Resistors", Digikey Description="CRGCQ 0603 1K2 1%", Height=0.55mm, Ipc Land Pattern Name=RESC16080X45, Lead Free=Yes, Manufacturer Part Number=CRGCQ0603F1K2, Octopart=https://octopart.com/crgcq0603f1k2-te+connectivity-91018051, RoHS=TRUE, Series=CRGCQ
R18: library part CMP-13261-004107-1, "25% 0.25W ±100ppm/°C Molded SMD T/R", Case Code (Imperial)=1206, Case Code (Metric)=3216, Max Operating Temperature=155°C, Max Power Dissipation=250mW, Min Operating Temperature=-55°C, Resistance=2kR, Temperature Coefficient=100ppm/°C, Tolerance=5%, Voltage Rating (DC)=200V, Case/Package=1206, Composition="Thick Film", Contact Plating=Tin, Depth=1.6mm, Features="Moisture Resistant", Height=0.026inch, Lead Free="Lead Free", Length=0.126inch, Number of Terminations=2, Packaging="Tape and Reel", Radiation Hardening=No, Width=0.063inch
SW1: library part CMP-10040-000033-1, "TACT 4.5 X 4.5, 3.8 MM H, 2.5N,", Max Operating Temperature=70°C, Min Operating Temperature=-20°C, Operating Force=250gf, Ratings=IP40, Actuator Type=Standard, Illumination Type=Non-Illuminated, Mechanical Life=100000Cycles, Mount="Surface Mount", Packaging="Tape and Reel", Switch Function=Off-Mom, Switch Travel=0.25mm, Termination="Gull Wing", Throw Configuration=SPST
U1: library part CMP-07128-000033-1, "IC REG LINEAR 5V 1A DPAK", Case/Package=DPAK, Dropout Voltage=2V, Max Input Voltage=35V, Max Operating Temperature=125°C, Max Output Current=1A, Max Output Voltage=5.2V, Min Input Voltage=10V, Min Operating Temperature=0°C, Min Output Voltage=5V, Output Voltage Accuracy=4%, Package Quantity=1, Power Supply Rejection Ratio (PSRR)=83dB, Quiescent Current=3.2mA, Accuracy=4%, Contact Plating=Tin, Halogen Free="Halogen Free", Height=2.38mm, Lead Free="Lead Free", Length=6.73mm, Mount="Surface Mount", Nominal Output Voltage=5V, Number Of Outputs=1, Number of Pins=3, Number of Regulators=1, Output Current=1A, Output Type=Fixed, Output Voltage=5V, Packaging="Tape and Reel", Polarity=Positive, Radiation Hardening=No, REACH SVHC="No SVHC", Width=6.22mm
U2: library part CMP-0244-00272-2, "IC REG LINEAR POS ADJ 100MA 8SO", Case/Package=SO, Max Input Voltage=40V, Max Operating Temperature=125°C, Max Output Current=200mA, Max Output Voltage=37V, Min Input Voltage=4.2V, Min Operating Temperature=0°C, Min Output Voltage=1.2V, Output Current=100mA, Package Quantity=1, Power Supply Rejection Ratio (PSRR)=80dB, Reference Voltage=1.3V, Tolerance=5%, Contact Plating=Tin, Height=1.25mm, Lead Free="Lead Free", Length=5mm, Mount="Surface Mount", Number Of Outputs=1, Number of Pins=8, Number of Regulators=1, Output Type=Adjustable, Output Voltage=37V, Packaging="Tape and Reel", Polarity=Positive, Radiation Hardening=No, REACH SVHC="No SVHC", Weight=0.01787oz, Width=4mm
Y1: library part CMP-40224-000016-1, "CRYSTAL 32.7680KHZ 12.5PF SMD", Case/Package=SMD/SMT, ESR (Equivalent Series Resistance)=70kR, Frequency=32.768kHz, Frequency Tolerance=5ppm, Load Capacitance=12.5pF, Max Operating Temperature=85°C, Min Operating Temperature=-40°C, Mount="Surface Mount", Packaging="Tape and Reel"
Y2: "Crystal or Oscillator", Manufacturer_Name=ECS, Mouser Part Number=520-240-6-37B-7KM-TR, Arrow Part Number=ECS-240-6-37B-7KM-TR, Arrow Price/Stock=https://www.arrow.com/en/products/ecs-240-6-37b-7km-tr/ecs-international?region=europe, Datasheet Link=https://ecsxtal.com/store/pdf/ECX-1637B.pdf, Height=0.5mm, Manufacturer_Part_Number=ECS-240-6-37B-7KM-TR, Mouser Price/Stock=https://www.mouser.co.uk/ProductDetail/ECS/ECS-240-6-37B-7KM-TR?qs=B6kkDfuK7%2FDaYBrL7UqWUQ%3D%3D

## Free pads (board coordinates)
  round 4.5 hole 3.2: 10(4.315,51.154) 10(4.32,4.44) 10(82.18,4.44) 10(82.18,51.18)
  round 0.6 hole 0.3 mask+0.102: 11(21.459,20.142) 11(21.518,23.313) 11(22.654,19.964) 11(22.923,26.56) 11(23.687,19.964) 11(23.759,25.51) 11(24.778,17.464) 11(27.338,28.173) 11(30.023,28.993) 11(30.566,25.506) 11(31.438,19.48) 11(32.541,22.822) 11(36.877,18.425) 11(37.46,15.039) 11(37.76,16.34) 11(38.06,17.52) 11(39.334,16.464) 11(39.922,37.54) 11(41.26,39.04) 11(43.16,44) 11(45.56,16.407) 11(45.56,17.803) 11(50.86,29.42) 11(52.165,28.56) 11(58.6,15.052) 11(59.042,15.807) 11(65.067,16.608) 11(65.067,17.757) 11(65.744,25.232) 11(65.744,39.48) 11(65.82,15.322)
  round 1 hole 0.762 mask+0.102: 12(31.271,51.6)

## Nets (pads, with @x,y where several pads share a name; then routed paths per layer and width w, separated by ;. In a path a pad name is that pad's centre, name@x,y a point inside that pad or via, vN(x,y) a via of type N, cw(c..) or ccw(c..) an arc to the next point about the centre after c; other vN are vias at no path point)
+5: C12.1 C14.1 P1.4 pad.12 U1.3 U2.1 | length 101.7
  Top Layer w0.5: U1.3 27.695,48.504 C12.1 31.3,50.631 ; pad.12@31.34,51.6 31.3,51.56 31.3,50.631 ; U2.1 34.831,48.583 34.831,50.556 C14.1 31.3,50.631
  Bottom Layer w0.5: pad.12 31.367,51.696 31.704,51.696 31.814,51.805 50.076,51.805 61.052,40.829 61.052,13.781 64.5,10.333 64.5,6.03 62.43,3.96 49.5,3.96 P1.4
GND: BT2.1 C1.1 C2.1 C3.1 C4.1 C5.2 C6.1 C7.1 C8.2 C9.1 C10.1 C11.2 C12.2 C13.1 C14.2 C15.2 C16.1 D1.1 D2.3 D4.3 D6.3 IC1.7 IC2.2 IC3.5 IC5.2 J1.2 J2.1 J4.1 J7.6 J7.G1 J7.G2 J7.G3 J7.G4 J8.1 P1.3 pad.11@24.778,17.464 pad.11@30.023,28.993 pad.11@30.566,25.506 pad.11@32.541,22.822 pad.11@45.56,16.407 pad.11@58.6,15.052 pad.11@59.042,15.807 pad.11@65.067,16.608 pad.11@65.067,17.757 Q1.2 R1.2 R3.2 R4.2 R5.1 R11.1 R12.2 R13.1 R15.2 R16.1 R18.1 SW1.1 SW1.2 U1.4 Y2.2 Y2.4 | length 3.4
  Top Layer w0.2: C10.1 30.959,24.815 30.173,24.815 ; C10.1@29.253,24.82 30.173,24.82
INPUT: D5.1 J1.1 J5.2 Q2.5-6-7-8 | length 53.1
  Top Layer w0.5: 42.518,53.02 42.573,52.965 D5.1
  Top Layer w1: J1.1 9.074,47.779 ; Q2.5-6-7-8 9.074,47.779 ; J5.2 44.175,53.02 42.518,53.02 14.315,53.02 9.074,47.779
NetBT2_2: BT2.2 D3.1 | length 38.1
  Top Layer w0.5: BT2.2@17.88,15.221 13.519,15.221 12.94,15.8 12.94,36.113 14.583,37.756 D3.1
NetC6_2: C6.2 IC1.2 Y1.1 | length 9.8
  Top Layer w0.2: C6.2@37.231,32.251 35.415,32.251 Y1.1@35.334,32.332 ; IC1.2 38.245,27.91 35.334,30.821 35.334,32.251 Y1.1@35.334,32.332 ; Y1.1@35.334,32.332 Y1.1 Y1.1@35.334,32.332
NetC9_2: C9.2 IC1.3 Y1.2 | length 12.4
  Top Layer w0.2: C9.2 31.051,32.026 Y1.2@32.192,32.026 ; IC1.3 37.756,27.41 33.375,31.791 33.092,31.791 32.642,32.241 Y1.2 ; Y1.2@32.192,32.026 32.642,32.026 Y1.2 ; Y1.2@32.192,32.026 32.642,32.476 Y1.2
NetC10_2: C10.2 IC1.9 Y2.1 | length 12.8
  Top Layer w0.2: C10.2 C10.2@29.268,23.33 ; C10.2@29.282,23.344 31.005,23.344 32.497,21.851 34.319,21.851 36.877,24.41 IC1.9 ; Y2.1@30.676,23.364 Y2.1
NetC13_2: C13.2 Q2.1 Q2.2 Q2.3 U1.1 | length 18.3
  Top Layer w0.5: 16.535,48.077 Q2.2 Q2.1 16.535,45.445 16.296,45.206 16.296,44.962 16.071,44.737 C13.2 16.071,42.758 16.669,42.16 24.771,42.16 26.113,43.502 28.013,43.502 U1.1
NetC16_2: C16.2 IC1.8 Y2.3 | length 7
  Top Layer w0.2: Y2.3 33.815,24.723 C16.2 ; C16.2@34.752,24.91 IC1.8
NetD1_2: D1.2 R10.2 | length 3.2
  Top Layer w0.2: R10.2 52.872,15.039 D1.2
NetD2_1: D2.1 IC2.7 J9.1 J9.3 R2.1 | length 13.8
  Top Layer w0.5: IC2.7 73.51,26.453 73.926,26.453 74.881,27.408 J9.3 ; R2.1@75.52,22.271 75.588,22.339 78.915,22.339 J9.1
NetD2_2: D2.2 IC2.6 J9.2 R2.2 | length 13.4
  Top Layer w0.5: IC2.6 74.119,25.183 ; R2.2 74.098,22.4 74.098,22.698 74.119,22.72 74.119,25.183 ; J9.2 78.458,24.382 74.92,24.382 74.119,25.183
NetD4_1: D4.1 IC5.7 J10.1 J10.3 R27.1 | length 13.8
  Top Layer w0.5: IC5.7@69.304,16.552 D4.1@73.623,16.552 ; D4.1@73.623,16.567 73.931,16.567 74.284,16.92 78.514,16.92 78.771,16.662 J10.3 ; R27.1 75.286,11.599 78.952,11.599 J10.1
NetD4_2: D4.2 IC5.6 J10.2 R27.2 | length 13.9
  Top Layer w0.5: IC5.6@69.304,15.282 73.036,15.282 73.101,15.217 D4.2@73.51,15.217 ; D4.2 73.51,13.644 ; R27.2 73.969,11.562 73.51,12.021 73.51,13.644 ; J10.2 74.028,14.162 73.51,13.644
NetD5_2: D5.2 J5.1 Q1.3 | length 11.9
  Top Layer w0.5: D5.2 49.114,48.497 49.38,48.23
  Top Layer w1: Q1.3 48.38,47.23 49.38,48.23 49.38,50.315 J5.1
NetIC1_11: IC1.11 J6.1 R4.1 | length 32.9
  Top Layer w0.2: J6.1 R4.1 21.24,9.713 27.366,15.839 34.699,15.839 35.18,16.32 35.18,21.054 37.536,23.41 IC1.11
NetIC1_12: IC1.12 J6.3 R3.1 | length 29.7
  Top Layer w0.2: J6.3 R3.1 25.792,9.713 25.909,9.83 25.909,13.469 27.879,15.439 34.864,15.439 35.58,16.154 35.58,20.695 37.795,22.91 IC1.12
NetIC1_13: IC1.13 J6.5 R1.1 | length 26
  Top Layer w0.2: J6.5 29.659,9.686 30.946,9.686 31.063,9.803 31.063,13.524 32.578,15.039 35.03,15.039 35.98,15.989 35.98,18.94 36.128,19.088 41.293,19.088 41.41,19.205 IC1.13
NetIC1_19: IC1.19 IC5.4 | length 27.2
  Top Layer w0.2: IC1.19 44.41,14.862 46.212,13.06 55.766,13.06 56.718,14.012 IC5.4@63.88,14.012
NetIC1_20: IC1.20 IC5.1 | length 27.7
  Top Layer w0.2: IC1.20 44.91,15.189 46.639,13.46 55.418,13.46 59.772,17.814 63.872,17.814 IC5.1@63.88,17.822
NetIC1_21: IC1.21 pad.11@43.16,44 pad.11@45.56,17.803 R19.1 | length 53.4
  Top Layer w0.2: pad.11@43.16,44 44.535,44 R19.1 ; IC1.21 45.41,18.061 45.56,17.911 pad.11@45.56,17.803
  Bottom Layer w0.2: pad.11@43.16,44 43.68,44 46.625,41.055 54.545,41.055 56.2,39.4 56.2,17.833 54.831,16.464 46.899,16.464 pad.11@45.56,17.803
NetIC1_22: IC1.22 P1.1 | length 60.9
  Top Layer w0.2: P1.1 40.46,7.73 42.56,9.83 62.197,9.83 66.592,14.225 66.592,18.078 66.003,18.667 65.994,18.667 65.814,18.847 59.16,18.847 56.377,16.064 48.549,16.064 45.91,18.703 IC1.22
NetIC1_23: IC1.23 P1.2 | length 58.7
  Top Layer w0.2: P1.2 42.96,7.43 44.864,9.334 62.267,9.334 66.992,14.059 66.992,18.244 65.989,19.247 58.994,19.247 56.211,16.464 48.715,16.464 46.41,18.769 IC1.23
NetIC1_24: IC1.24 R10.1 | length 6.3
  Top Layer w0.2: IC1.24 46.91,19.214 48.483,17.641 R10.1
NetIC1_29: IC1.29 IC3.2 IC3.3 | length 36.1
  Top Layer w0.2: IC1.29 57.063,24.91 58.902,23.071 65.535,23.071 66.592,24.128 66.592,34.648 66.24,35 ; IC3.3@63.645,35 66.24,35 ; IC3.2@63.645,36.27 64.97,36.27 66.24,35
NetIC1_33: IC1.33 IC2.4 | length 16.5
  Top Layer w0.2: IC1.33 57.211,26.91 60.208,23.913 IC2.4
NetIC1_34: IC1.34 IC2.1 | length 15.4
  Top Layer w0.2: IC1.34 52.086,27.41 52.4,27.723 IC2.1
NetIC1_40: IC1.40 IC3.4 | length 20.9
  Top Layer w0.2: IC1.40 45.41,31.757 45.91,32.257 52.391,32.257 53.864,33.73 IC3.4@63.645,33.73
NetIC1_41: IC1.41 IC3.1 | length 23.1
  Top Layer w0.2: IC1.41 44.91,31.912 45.76,32.762 51.982,32.762 56.761,37.54 IC3.1@63.645,37.54
NetIC1_47: IC1.47 J8.2 pad.11@41.26,39.04 | length 67.9
  Top Layer w0.2: pad.11@41.26,39.04 41.26,36.806 41.91,36.156 IC1.47
  Bottom Layer w0.2: pad.11@41.26,39.04 40.415,39.885 40.415,42.835 42.18,44.6 43.646,44.6 46.791,41.455 54.859,41.455 56.6,39.714 56.6,7.965 J8.2
NetIC1_48: IC1.48 J8.3 pad.11@39.922,37.54 | length 70.1
  Top Layer w0.2: pad.11@39.922,37.54 39.96,37.54 41.41,36.09 IC1.48
  Bottom Layer w0.2: pad.11@39.922,37.54 39.922,42.908 42.014,45 43.811,45 46.956,41.855 55.025,41.855 57,39.88 57,10.065 J8.3
NetJ4_2: D6.1 IC3.6 J4.2 R28.1 | length 10.5
  Top Layer w0.5: IC3.6@69.069,35 70.851,35 71.699,35 72.049,34.65 75.135,34.65 77.918,34.65 78.903,35.635 J4.2
NetJ4_3: D6.2 IC3.7 J4.3 R28.2 | length 11.1
  Top Layer w0.5: IC3.7@69.069,36.27 70.851,36.27 71.769,36.27 72.049,36.55 75.135,36.55 77.398,36.55 78.828,37.98 J4.3@79.26,37.98 ; J4.3 J4.3@79.138,37.98
NetJ7_CD1: IC1.14 J7.CD1 pad.11@36.877,18.425 | length 19.3
  Top Layer w0.2: pad.11@36.877,18.425 36.998,18.546 41.563,18.546 41.91,18.894 IC1.14
  Bottom Layer w0.2: J7.CD1 27.033,18.972 27.579,18.425 pad.11@36.877,18.425
NetQ1_1: Q1.1 R5.2 R19.2 | length 3.8
  Top Layer w1: R5.2 R19.2 47.381,44.079 Q1.1
NetQ2_4: Q2.4 R16.2 | length 4.6
  Top Layer w0.5: R16.2 16.847,50.852 17.508,50.192 17.508,49.259 17.215,48.966 16.542,48.966 Q2.4
NetR17_1: R17.1 R18.2 U2.4 | length 12.2
  Top Layer w0.5: U2.4 30.971,46.808 30.107,45.944 30.107,40.536 30.4,40.243 R18.2 31.523,40.254 R17.1
NRST: C7.2 IC1.10 J2.5 pad.11@31.438,19.48 SW1.3 SW1.4 | length 74.1
  Top Layer w0.2: C7.2@26.74,19.689 26.94,19.689 27.415,20.164 SW1.4 31.438,20.164 ; pad.11@31.438,19.48 31.438,20.164 ; IC1.10 37.186,23.91 34.759,21.483 34.759,20.564 34.359,20.164 SW1.3 31.438,20.164
  Bottom Layer w0.2: pad.11@31.438,19.48 31.923,19.964 38.963,19.964 40.259,18.667 54.867,18.667 55.8,19.6 55.8,36.907 52.72,39.987 45.037,39.987 J2.5
SD_CS: IC1.15 J7.2 pad.11@22.654,19.964 pad.11@22.923,26.56 pad.11@38.06,17.52 | length 37.6
  Top Layer w0.2: pad.11@22.654,19.964 22.654,26.291 pad.11@22.923,26.56 ; pad.11@38.06,17.52 38.659,18.119 41.932,18.119 42.41,18.597 IC1.15
  Bottom Layer w0.2: pad.11@22.654,19.964 22.654,19.416 21.859,18.622 21.859,16.941 22.886,15.914 36.171,15.914 37.025,16.768 37.308,16.768 pad.11@38.06,17.52 ; pad.11@22.923,26.56 25.425,26.56 J7.2
SD_MISO: IC1.17 J7.7 pad.11@39.334,16.464 | length 37.2
  Top Layer w0.2: pad.11@39.334,16.464 42.06,16.464 43.41,17.814 IC1.17
  Bottom Layer w0.2: J7.7 21.259,21.172 20.839,20.751 20.839,16.172 21.897,15.114 36.502,15.114 37.027,15.639 38.509,15.639 pad.11@39.334,16.464
SD_MOSI: IC1.18 J7.3 pad.11@23.687,19.964 pad.11@23.759,25.51 pad.11@37.46,15.039 | length 45.4
  Top Layer w0.2: pad.11@23.687,19.964 23.687,25.437 pad.11@23.759,25.51 ; pad.11@37.46,15.039 41.36,15.039 43.91,17.589 IC1.18
  Bottom Layer w0.2: pad.11@23.687,20.18 23.687,19.39 23.307,19.01 23.141,19.01 22.259,18.128 22.259,17.107 23.052,16.314 26.052,16.314 36.005,16.314 37.811,18.12 38.735,18.12 39.934,16.92 39.934,16.215 39.56,15.841 39.56,15.821 38.778,15.039 pad.11@37.46,15.039 ; pad.11@23.759,25.51 25.475,25.51 J7.3
SD_SCK: IC1.16 J7.5 pad.11@21.459,20.142 pad.11@21.518,23.313 pad.11@37.76,16.34 | length 36.8
  Top Layer w0.2: pad.11@21.459,20.142 21.459,23.254 pad.11@21.518,23.313 ; pad.11@37.76,16.34 38.94,17.52 42.21,17.52 42.91,18.22 IC1.16
  Bottom Layer w0.2: pad.11@21.459,20.142 21.459,16.775 22.721,15.514 36.337,15.514 37.16,16.337 37.757,16.337 pad.11@37.76,16.34 ; pad.11@21.577,23.372 J7.5
SHDN1: IC1.27 IC2.5 R12.1 | length 25.2
  Top Layer w0.2: IC1.27 54.292,23.91 56.695,21.507 67.137,21.507 69.035,23.405 69.035,23.688 69.256,23.908 IC2.5@69.538,23.908
  Top Layer w0.5: IC2.5@69.538,23.908 71.453,23.908 R12.1
SHDN2: IC1.25 IC5.5 R15.1 | length 29.7
  Top Layer w0.2: IC1.25 51.662,22.91 54.701,19.871 66.863,19.871 67.498,19.236 67.498,14.658 68.144,14.012 IC5.5@69.304,14.012
  Top Layer w0.5: IC5.5@69.304,14.012 R15.1
STB1: IC1.28 IC2.8 R11.2 | length 28.3
  Top Layer w0.2: IC1.28 55.567,24.41 57.706,22.271 66.077,22.271 67.506,23.699 67.506,27.248 67.981,27.723 IC2.8
  Top Layer w0.5: IC2.8 69.07,27.722 71.456,27.722 R11.2
STB2: IC1.26 IC5.8 R13.2 | length 26.8
  Top Layer w0.2: IC1.26 53.243,23.41 55.969,20.684 67.239,20.684 67.979,19.945 67.979,17.94 68.096,17.822 IC5.8@69.304,17.822
  Top Layer w0.5: IC5.8@69.304,17.822 69.328,17.846 71.668,17.846 R13.2
SWCLK: IC1.36 J2.3 pad.11@50.86,29.42 | length 12.5
  Top Layer w0.2: IC1.36 49.85,28.41 pad.11@50.86,29.42
  Bottom Layer w0.2: J2.3 48.715,36.965 48.715,35.898 50.86,33.753 pad.11@50.86,29.42
SWDIO: IC1.35 J2.4 pad.11@52.165,28.56 | length 19.8
  Top Layer w0.2: IC1.35 51.515,27.91 pad.11@52.165,28.56
  Bottom Layer w0.2: J2.4 45.522,37.972 45.522,38.672 45.71,38.86 48.481,38.86 49.115,38.226 49.115,36.064 52.165,33.014 pad.11@52.165,28.56
VBAT: C5.1 D3.3 IC1.4 | length 21.9
  Top Layer w0.2: D3.3 26.828,36.806 26.528,36.506 26.528,36.456 26.428,36.356 26.428,29.779 26.545,29.662 C5.1 28.301,29.662 33.639,29.662 36.391,26.91 IC1.4
VDD: C1.2 C2.2 C3.2 C4.2 C8.1 C11.1 C15.1 IC1.5 IC1.6 IC2.3 IC3.8 IC5.3 J2.2 J6.2 J6.4 J6.6 J7.4 pad.11@27.338,28.173 pad.11@65.82,15.322 pad.11@65.744,25.232 pad.11@65.744,39.48 R17.2 U2.2 U2.3 U2.6 U2.7 | length 224.8
  Top Layer w0.2: C4.2@31.044,28.173 34.117,28.173 35.88,26.41 ; IC1.6 36.38,25.91 35.88,26.41 ; IC1.5 35.88,26.41
  Top Layer w0.5: C4.2 31.17,28.172 27.339,28.172 27.338,28.173 26.138,28.173 25.845,28.466 25.845,37.345 26.54,38.04 35.96,38.04 36.96,39.04 36.96,40.74 36.068,41.632 ; U2.6 32.241,46.78 ; U2.3 32.241,46.78 ; U2.2 33.511,46.78 ; R17.2@35.108,40.281 35.108,41.339 34.815,41.632 ; C15.1 37.108,46.78 33.511,46.78 ; J2.2 50.365,39.696 48.429,41.632 ; C11.1 61.277,15.277 61.79,15.277 61.795,15.282 IC5.3 65.753,15.282 65.793,15.322 pad.11@65.82,15.322 ; C8.1 61.277,25.142 61.754,25.142 61.795,25.183 IC2.3 63.694,25.232 pad.11@65.744,25.232 ; pad.11@65.744,39.48 63.592,41.632 ; IC3.8@69.069,37.54 70.769,37.54 71.062,37.833 71.062,39.251 68.681,41.632 63.592,41.632 ; 32.241,46.78 33.511,46.78 ; 33.511,46.78 U2.7 33.511,41.925 33.804,41.632 34.815,41.632 ; 34.815,41.632 36.068,41.632 ; 36.068,41.632 48.429,41.632 ; 48.429,41.632 63.592,41.632
  Bottom Layer w0.5: J6.2 22.159,3.741 22.88,3.02 27.846,3.02 ; J7.4 22.252,24.472 21.959,24.764 21.959,29.144 22.477,29.662 C2.2 C1.2 ; C2.2@27.094,29.662 27.319,29.437 27.319,28.193 pad.11@27.338,28.173 ; J6.4 27.159,3.707 27.846,3.02 ; J6.6 32.159,5.256 29.923,3.02 ; pad.11@65.82,15.322 65.82,4.63 64.21,3.02 29.923,3.02 ; pad.11@65.82,39.404 65.82,15.543 pad.11@65.93,15.433 ; 27.846,3.02 29.923,3.02
pads on no net: D3.2 IC1.1 IC1.30 IC1.31 IC1.32 IC1.37 IC1.38 IC1.39 IC1.42 IC1.43 IC1.44 IC1.45 IC1.46 J2. J6. J7.1 J7.8 J7.MH1 J7.MH2 U2.5 U2.8

## Polygon pours and split planes (outlines as drawn)
GND on Top Layer "Top Layer-GND" (solid, pour order 0): 4.133,0.011 cw(c4.133,4.163) -0.02,4.163 -0.017,51.184 cw(c4.464,51.184) 4.464,55.665 80.681,55.665 cw(c80.681,51.269) 85.077,51.269 85.099,4.284 cw(c80.805,4.284) 80.805,-0.011
GND on Bottom Layer "Top Layer-GND" (solid, pour order 1): 4.133,0.011 cw(c4.133,4.163) -0.02,4.163 -0.017,51.184 cw(c4.464,51.184) 4.464,55.665 80.681,55.665 cw(c80.681,51.269) 85.077,51.269 85.099,4.284 cw(c80.805,4.284) 80.805,-0.011

## Keep-outs
Keep-Out Layer:
  the board outline again, w0.254

## Other copper
Top Layer:
  region net NetQ2_4: 14.838,50.446 14.838,51.258 17.137,51.258 17.88,50.515 17.88,49.142 17.508,48.77 16.04,48.77 16.04,49.176 17.03,49.176 17.03,50.136 16.721,50.446 15.596,50.446
  region net INPUT: 4.99,43.695 4.99,45.245 8.921,49.176 15.405,49.176 15.405,46.865 15.328,46.789 9.634,46.789 6.54,43.695
  region net NetC13_2: 16.04,48.516 16.04,45.856 15.596,45.412 15.596,43.662 16.721,43.662 16.721,45.187 17.43,45.897 17.43,48.313 17.227,48.516 17.03,48.516

## Silkscreen, mask and mechanical layers (free items; w line width, h text height)
Top Overlay:
  drawing of 19 lines, arcs and shapes, not listed
  text "ı" at 49.42,54.64 h1.52 r90
  text "+" at 46.247,54.237 h1.52
  text "V0.9.0" at 75.281,45.331 h1
  text "+" at 0.88,43.742 h1.52
  text "ı" at 1.106,41.929 h1.52
  text "SWD" at 40.36,41.657 h1.52
  text "A" at 84.135,38.08 h1.52 r90
  text "B" at 84.152,35.74 h1.52 r90
  text "+" at 50.64,35.158 h1.52 r180
  text "ı" at 52.56,34.72 h1.52 r270
  text "CLK" at 47.287,34.472 h0.6
  text "NRST" at 42.011,34.454 h0.6
  text "DIO" at 44.695,34.454 h0.6
  text "GND" at 84.135,31.34 h1.52 r90
  text "CH1" at 84.157,27.548 h1.52 r90
  text "CL2" at 84.157,24.355 h1.52 r90
  text "TERM2" at 84.173,19.433 h1.52 r90
  text "CH2" at 84.135,15.823 h1.52 r90
  text "CL2" at 84.118,12.758 h1.52 r90
  text "DISPLAY" at 37.92,8.437 h1.52
  text "TERM2" at 84.135,7.64 h1.52 r90
  text "TEMP3" at 29.096,0.575 h1.52
  text "GND" at 44.34,0.577 h1.52
  text "5V" at 47.781,0.577 h1.52
  text "TEMP1" at 18.48,0.558 h1.52
  text "RX" at 41.9,0.56 h1.52
  text "GND" at 54.96,0.557 h1.52
  text "TX" at 58.4,0.559 h1.52
  text "RX" at 61.071,0.559 h1.52
  text "TEMP2" at 23.736,0.538 h1.52
  text "TX" at 39.475,0.54 h1.52
Bottom Overlay:
  drawing of 19 lines, arcs and shapes, not listed
  text "V0.9.0" at 57.199,45.351 h1